# EAGLE board BigButton (EAGLE 6.5.0)
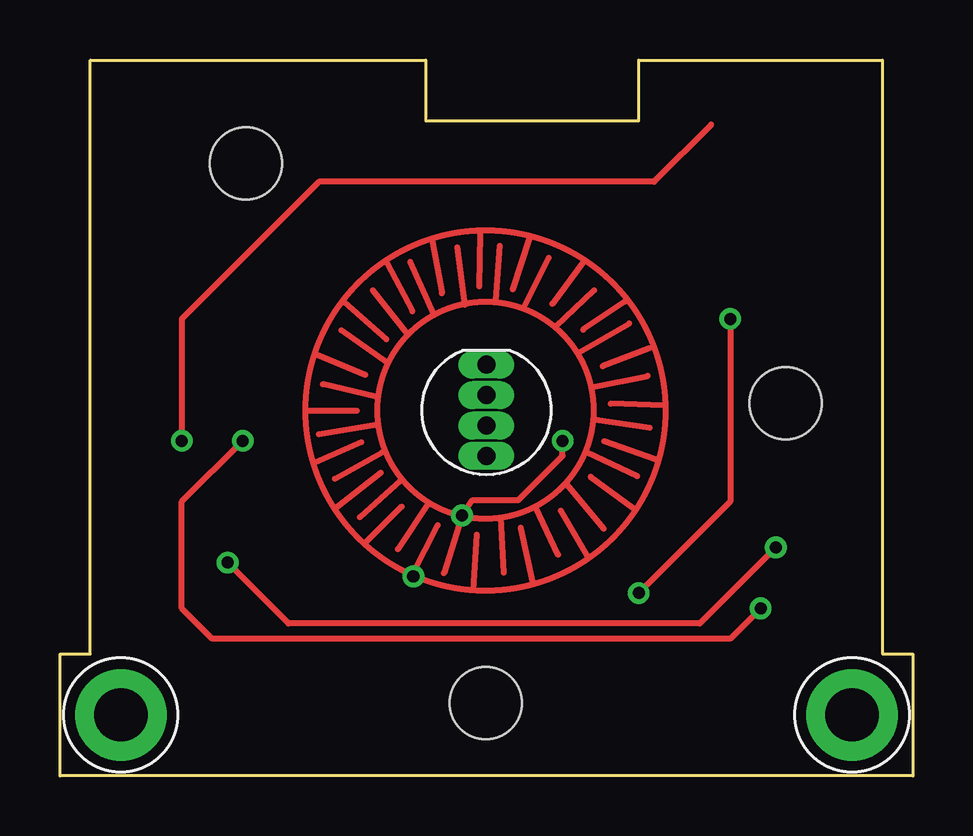
[diagram p0: board, top side]
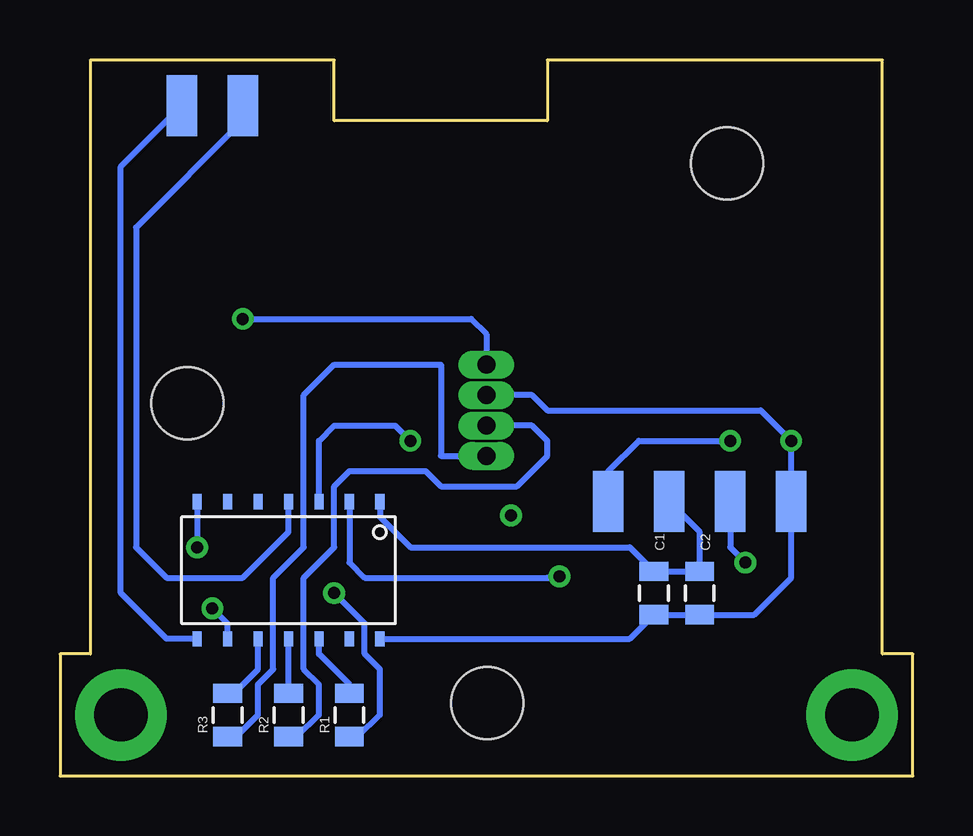
[diagram p1: board, bottom side, seen from below]

Size 35.56 x 29.84 mm. Coordinates in mm from the lower left corner, seen from the top.
Copper layers (1*16): Top 0.0178mm / dielectric 59mil / Bottom 0.0178mm
Design rules "SSC-EAGLE-2Lyr_v1.0.0.3": minimum track width 6mil, minimum drill 14mil, track to track 6mil, track to pad 6mil, pad to pad 6mil, via to via 6mil, smd to smd 6mil, copper to edge 20mil, drill to drill 16mil, minimum pad ring 8mil, minimum via ring 8mil, stop-mask expansion 3mil, vias tented up to drill 0mil, thermal gap 10mil

## Footprints (pad centres in the part's own frame; a part is rotated, then mirrored left to right if it is on the bottom)
0805 = smd 0.8 x 1.2: 1 -0.9,0; 2 0.9,0
LED-RGB-THRU = drill 0.762 pad 0.889 long: 1 1.905,0; 2 0.635,0; 3 -0.635,0; 4 -1.905,0
BUTTONPAD = drill 0.508: SIG7 -6.923,3.048; SIG8 -4.383,1.016 | hole 3: -12.211,0.035; 0.289,-12.465; 10.289,10.035
SOIC14 = smd 0.381 x 0.635: 1 0,-3.175; 2 1.27,-3.175; 3 2.54,-3.175; 4 3.81,-3.175; 5 5.08,-3.175; 6 6.35,-3.175; 7 7.62,-3.175; 8 7.62,2.54; 9 6.35,2.54; 10 5.08,2.54; 11 3.81,2.54; 12 2.54,2.54; 13 1.27,2.54; 14 0,2.54
FOOTPRINT2 = smd 1.27 x 2.54 bottom: GND 5.08,11.43; MISO 30.48,27.94; RESET 27.94,27.94; SCL 12.7,11.43; SDA 7.62,11.43; VCC 10.16,11.43 | drill 2.223 pad 3.81: P$1 2.54,2.54; P$2 33.02,2.54

## Placement (x,y rotation side)
C1  10uF  [0805]  10.79,7.62 90 bottom
C2  .1uF  [0805]  8.89,7.62 90 bottom
D1  LED-RGB-CC-THRUCLEAR  [LED-RGB-THRU]  17.78,15.24 90 top
R1  [0805]  23.5,2.54 90 bottom
R2  [0805]  26.04,2.54 90 bottom
R3  [0805]  28.57,2.54 90 bottom
U$1  BUTTONPAD  [BUTTONPAD]  17.78,15.24 90 top
U$3  TINY841  [SOIC14]  22.23,8.26 180 bottom
U$4  FOOTPRINTFOOTPRINT-2  [FOOTPRINT2]  0,0 0 top

## Library data of the parts
C1 C2 = SparkFun-Capacitors
D1 = SparkFun-LED; PROD_ID: DIO-08418
R1-R3 = SparkFun-Resistors
U$1 U$3 U$4 = IntegerLabs

## Nets
1: U$1.SIG7 U$3.2
2: U$1.SIG8 U$3.3
B: D1.4 R3.1
G: D1.3 R2.1
GND: C1.1 C2.1 D1.2 U$3.14 U$4.GND
MISO: U$3.8 U$4.MISO
N$1: R1.2 U$3.12
N$2: R2.2 U$3.11
N$3: R3.2 U$3.10
R: D1.1 R1.1
RESET: U$3.4 U$4.RESET
SCL/SCK: U$3.9 U$4.SCL
SDA/MOSI: U$3.7 U$4.SDA
STATUS: U$3.5
VCC: C1.2 C2.2 U$3.1 U$4.VCC

## Tracks (layer width: path | path; a pad name or v marks a point on that pad's centre or on a via)
1
  Bottom 0.254: U$3.2 23.5,8.89 22.86,8.26 15.24,8.26 14.61,8.19 U$1.SIG7
2  (via drill 0.5)
  Top 0.254: U$1.SIG8 17.21,11.49 19.11,11.49 20.95,13.34 v20.95,13.97
  Bottom 0.254: U$3.3 24.77,13.97 24.13,14.61 21.59,14.61 v20.95,13.97
B
  Bottom 0.254: D1.4 19.68,13.34 19.68,17.14 24.13,17.14 25.4,15.88 25.4,9.53 26.67,8.26 26.67,4.45 27.3,3.81 27.3,2.54 28.2,1.64 R3.1
G
  Bottom 0.254: D1.3 15.88,14.61 15.24,13.97 15.24,13.34 16.51,12.06 19.68,12.06 20.32,12.7 23.5,12.7 24.13,12.06 24.13,9.53 25.4,8.26 25.4,4.45 24.77,3.81 24.77,2.54 25.66,1.64 R2.1
GND  (via drill 0.5)
  Top 0.254: 27.15,27.15 24.77,24.77 10.79,24.77 5.08,19.05 v5.08,13.97
  Bottom 0.254: U$3.14 11.8,5.71 C1.1 C2.1 6.62,6.72 5.08,8.26 U$4.GND v5.08,13.97 6.35,15.24 15.24,15.24 15.88,15.88 D1.2
MISO
  Bottom 0.254: U$3.8 31.11,5.71 33.02,7.62 33.02,25.4 U$4.MISO
N$1
  Bottom 0.254: R1.2 23.5,3.81 24.77,5.08 U$3.12
N$2
  Bottom 0.254: R2.2 U$3.11
N$3
  Bottom 0.254: R3.2 28.31,3.44 27.3,4.45 U$3.10
R  (via drill 0.5)
  Top 0.254: v27.94,19.05 27.94,11.43 v24.13,7.62
  Bottom 0.254: v27.94,19.05 18.41,19.05 17.78,18.41 D1.1 | R1.1 23.12,1.64 22.23,2.54 22.23,4.45 22.86,5.08 22.86,6.35 v24.13,7.62
RESET
  Bottom 0.254: U$4.RESET 27.94,27.3 32.38,22.86 32.38,9.53 31.11,8.26 27.94,8.26 26.04,10.16 U$3.4
SCL/SCK  (via drill 0.5)
  Top 0.254: v29.21,6.99 27.94,5.71 6.35,5.71 5.08,6.99 5.08,11.43 v7.62,13.97
  Bottom 0.254: U$3.9 28.57,6.35 v29.21,6.99 | U$4.SCL 12.7,12.7 11.43,13.97 v7.62,13.97
SDA/MOSI  (via drill 0.5)
  Top 0.254: v29.84,9.53 26.67,6.35 9.53,6.35 v6.99,8.89
  Bottom 0.254: U$3.7 v29.84,9.53 | U$4.SDA 7.62,9.53 v6.99,8.89
VCC
  Bottom 0.254: U$3.1 22.23,10.79 20.95,9.53 11.8,9.53 C1.2 C2.2 8.89,10.16 U$4.VCC